# Altium PCB MainBoard.PcbDoc (part 3 of 5)
Units mm, origin at the board's own origin, x right, y up, seen from the top; angles counter-clockwise.
Board outline 82.15 x 81.5 mm, 4 copper layers (Top Layer, GND Top, GND Bot, Bottom Layer), stack 1.57 mm thick; 116 components, 97 nets, 468 pads, 3117 vias.
Unrouted connection lines stored in the file: 5.
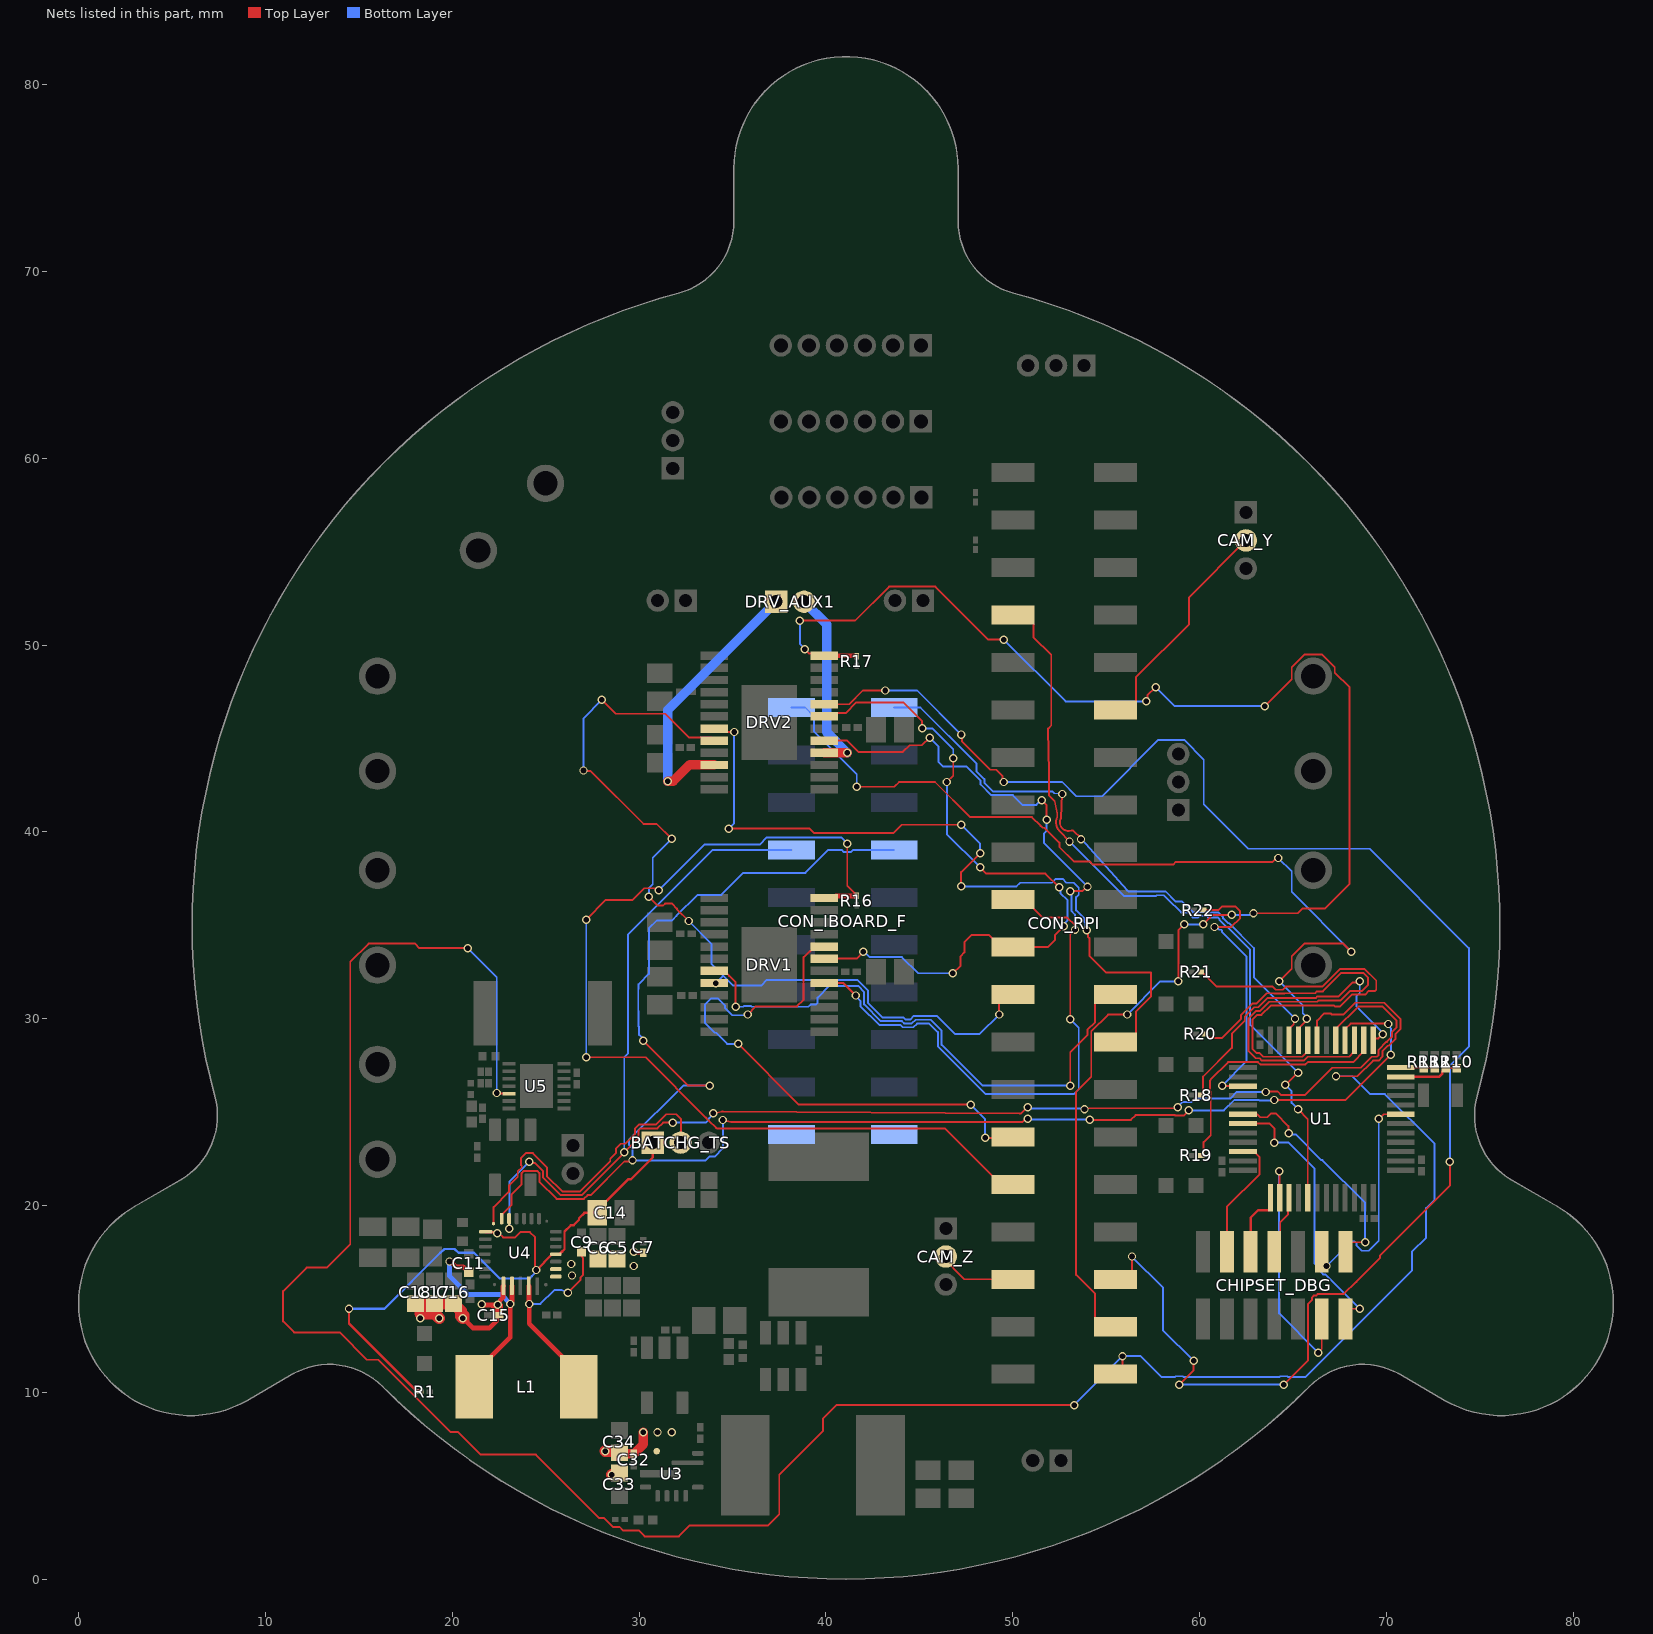
[diagram p4: the nets of this part, all layers, seen from the top]

## Via types
v1: diameter 0.45, hole 0.3, Top Layer to Bottom Layer, tented both sides, 3113 vias
v2: diameter 0.45, hole 0.3, Top Layer to Bottom Layer, 4 vias

## Nets (pads, with @x,y where several pads share a name; then routed paths per layer and width w, separated by ;. In a path a pad name is that pad's centre, name@x,y a point inside that pad or via, vN(x,y) a via of type N, cw(c..) or ccw(c..) an arc to the next point about the centre after c; other vN are vias at no path point) (continued)
BATCHG_REGN: BATCHG_TS.1 C14.2 R1.1 U4.5 U4.17 | length 33.4
  Top Layer w0.102: v1(22.412,18.513) 22.506,18.513 22.721,18.299 23.376,18.299 23.655,18.578 24.156,18.578 24.441,18.293 24.441,16.612 v1(24.504,16.549)
  Top Layer w0.127: v1(14.478,14.478) 14.478,13.679 18.056,10.101 18.22,10.101 R1.1@18.288,10.033 ; U4.17@21.797,18.599 21.834,18.563 22.362,18.563 v1(22.412,18.513) ; v1(24.504,16.549) 24.524,16.549 24.924,16.949 24.924,16.98 25.208,17.264 25.212,17.264 25.311,17.363 25.511,17.363 U4.5@25.547,17.399 25.747,17.399 25.882,17.534 25.886,17.534 26.012,17.66 26.012,18.61 26.352,18.949 26.499,18.949 26.788,19.237 26.788,19.321 27.076,19.609 C14.2@27.773,19.609 27.773,19.76 29.414,21.4 29.557,21.4 30.734,22.577 BATCHG_TS.1@30.734,23.368
  Bottom Layer w0.127: v1(14.478,14.478) 16.371,14.478 19.363,17.47 19.377,17.47 19.58,17.673 20.133,17.673 20.336,17.47 21.169,17.47 22.547,16.092 24.138,16.092 24.263,16.217 24.263,16.22 24.504,16.462 v1(24.504,16.549)
BATCHG_SCL: CON_IBOARD_F.7 U1.17 U4.14 | length 84
  Top Layer w0.102: U4.14@23.047,19.299 23.055,19.292 23.055,18.756 v1(23.062,18.749) ; v1(24.13,22.352) 24.197,22.285 24.411,22.285 24.872,21.824 24.872,21.492 25.806,20.558 26.936,20.558 29.21,22.832 v1(29.21,22.86) 29.982,23.632 29.982,24.031 30.08,24.13 30.988,24.13 31.295,24.437 v1(31.803,24.437) ; v1(33.973,24.937) 34.397,25.023 cw(c34.486,24.581) 34.49,25.032 50.362,24.922 50.446,24.922 50.787,25.263 v1(50.8,25.263) ; v1(53.848,25.146) 53.908,25.206 58.775,25.206 v1(58.835,25.266) ; v1(63.55,26.079) 63.575,26.105 64.19,26.105 64.386,25.908 65.646,25.908 67.113,27.375 68.623,27.375 69.213,27.965 69.501,27.965 69.59,28.055 69.59,28.342 70.007,28.759 70.037,28.759 70.301,29.023 70.301,29.277 70.555,29.531 70.555,29.905 69.807,30.653 68.5,30.653 67.298,29.451 U1.17@67.298,28.854
  Bottom Layer w0.102: v1(23.062,18.749) 23.062,21.284 v1(24.13,22.352) ; v1(29.21,22.86) 29.21,27.933 29.407,28.13 29.407,34.487 33.96,39.04 CON_IBOARD_F.7@38.159,39.04 ; v1(31.803,24.437) 33.58,24.437 33.724,24.581 33.724,24.652 33.973,24.901 v1(33.973,24.937) ; v1(50.8,25.263) 50.858,25.205 53.789,25.205 v1(53.848,25.146) ; v1(58.835,25.266) 59.115,25.546 59.582,25.546 59.773,25.737 61.664,25.737 62.007,26.079 v1(63.55,26.079)
BATCHG_SDA: CON_IBOARD_F.14 U1.16 U4.15 | length 91.9
  Top Layer w0.102: U4.15@22.647,19.299 22.647,19.499 23.171,20.023 23.171,20.586 23.714,21.129 23.714,21.74 23.831,21.858 24.551,21.858 24.668,21.74 24.668,21.278 25.592,20.355 27.049,20.355 27.253,20.558 27.416,20.558 29.224,22.366 29.6,22.366 v1(29.652,22.418) ; v1(30.225,28.829) 32.638,26.416 v1(33.782,26.416) ; v1(34.486,24.581) 34.914,24.475 50.543,24.475 50.706,24.638 v1(50.8,24.638) ; v1(54.128,24.587) 56.326,24.587 56.58,24.841 58.684,24.841 58.71,24.815 59.156,24.815 v1(59.436,25.095) ; v1(64.005,25.651) 64.008,25.654 67.827,25.654 v1(70.244,28.071) ; U1.16@67.798,28.854 67.798,29.451 68.09,29.743 70.079,29.743 v1(70.104,29.718)
  Bottom Layer w0.102: v1(30.225,28.829) 30.225,28.917 30.002,29.14 30.002,29.563 29.972,29.592 29.959,31.319 cw(c30.41,31.322) 29.959,31.333 29.971,31.801 29.972,31.841 30.001,31.87 30.531,32.4 30.531,34.833 30.963,35.265 31.521,35.265 31.525,35.261 31.767,35.261 32.006,35.499 32.006,35.503 33.136,36.633 34.411,36.633 35.586,37.808 38.902,37.808 40.135,39.04 40.84,39.04 40.961,38.919 41.335,38.919 41.456,39.04 CON_IBOARD_F.14@43.659,39.04 ; v1(33.782,26.416) 32.366,26.416 29.464,23.514 29.464,23.244 29.661,23.047 29.661,22.427 v1(29.652,22.418) 33.561,22.418 33.758,22.616 34.046,22.616 34.486,23.056 v1(34.486,24.581) ; v1(50.8,24.638) 50.826,24.612 54.102,24.612 v1(54.128,24.587) ; v1(59.436,25.095) 61.31,25.095 61.865,25.65 63.187,25.65 63.209,25.628 63.982,25.628 v1(64.005,25.651) ; v1(70.104,29.718) 70.104,29.624 70.258,29.469 70.258,28.858 70.244,28.843 v1(70.244,28.071)
BATCHG_SW1: C9.2 L1.2 U4.28 | length 11.5
  Top Layer w0.102: v1(26.197,15.335) 26.867,16.005 26.867,16.143 27.013,16.289 27.013,17.191 26.924,17.28 C9.2@26.924,17.534
  Top Layer w0.254: U4.28@24.097,15.699 24.114,15.683 24.114,14.748 v1(24.13,14.732) 24.13,13.666 26.784,11.012 L1.2@26.784,10.312
  Bottom Layer w0.102: v1(24.13,14.732) 24.723,14.732 25.467,15.476 25.858,15.476 v1(26.197,15.335)
BATCHG_SW2: C11.1 L1.1 U4.26 | length 12.2
  Top Layer w0.254: v1(19.856,17.007) 19.909,17.007 20.2,16.716 20.592,16.716 C11.1@20.885,16.423 ; L1.1@21.184,10.312 21.184,11.012 23.114,12.943 v1(23.114,14.732) 23.114,14.785 23.197,14.868 U4.26@23.197,15.699
  Bottom Layer w0.254: v1(19.856,17.007) 19.856,16.212 20.828,15.24 22.616,15.24 23.114,14.742 v1(23.114,14.732)
BATCHG_SYS: C15.1 C16.1 C17.1 C18.1 C32.2 C33.2 C34.2 U3.8 U4.25 | length 14.9
  Top Layer w0.254: C16.1@20.466,14.558 20.466,14.517 20.809,14.174 20.809,13.752 21.118,13.443 21.973,13.443 22.376,13.846 22.376,14.398 22.109,14.666 21.637,14.666 v1(21.59,14.713) ; v1@21.59,14.681 v1(22.43,14.681) v1@22.508,14.759 ; C15.1@22.529,14.122 22.533,14.122 22.587,14.177 v1@22.587,14.681 ; 22.587,14.95 22.72,15.084 22.72,15.672 U4.25@22.747,15.699
  Top Layer w0.508: C34.2@28.956,6.765 29.017,6.705 C32.2@29.718,6.705 30.226,7.213 v1(30.226,7.874)
  Top Layer w0.635: C18.1@18.17,14.631 18.288,14.512 18.288,14.224 19.05,14.224 v1(19.304,13.97) ; C18.1@18.17,14.631 C18.1@18.034,14.766 C17.1@19.05,14.766 C16.1@20.066,14.766 20.466,14.367 20.466,14.078 v1(20.574,13.97) ; v1(28.194,6.858) 28.863,6.858 C34.2@28.956,6.765 ; v1(28.539,5.588) 28.863,5.588 C33.2@28.956,5.681
  other v1: 30.988,7.874 31.75,7.874 18.288,13.97
BATCHG_TS: BATCHG_TS.2 U4.16 | length 17.4
  Top Layer w0.102: U4.16@22.216,19.03 22.216,19.919 23.031,20.733 23.031,21.057 23.51,21.537 23.51,21.824 23.723,22.037 23.723,22.121 23.679,22.165 23.679,22.539 23.943,22.803 24.317,22.803 25.075,22.045 25.075,21.576 25.89,20.761 26.852,20.761 28.461,22.371 28.461,22.511 28.759,22.809 28.759,23.047 29.023,23.311 29.261,23.311 29.778,23.828 29.778,24.115 29.996,24.333 30.904,24.333 31.458,24.888 31.989,24.888 32.254,24.623 32.254,23.388 BATCHG_TS.2@32.234,23.368
BATCHG_VBUS: C5.2 C6.2 C7.1 CON_IBOARD_F.1 CON_IBOARD_F.20 U4.2 U4.3 | length 0.5
  Top Layer w0.254: v1(29.718,17.526) 29.743,17.501 30.201,17.501 C7.1@30.226,17.476
  other v1: 26.416,16.256 29.718,16.764 26.379,16.87
BATMON_ALERT: CON_RPI.40 U1.19 U5.12 | length 137.8
  Top Layer w0.102: v1(20.828,33.782) 18.248,33.782 18.01,34.02 15.525,34.02 14.544,33.039 14.544,17.935 13.286,16.678 12.205,16.678 10.948,15.42 10.948,13.794 11.534,13.208 13.97,13.208 15.431,11.747 16.05,11.747 19.923,7.874 20.32,7.874 21.522,6.672 24.481,6.672 27.884,3.269 28.13,3.269 28.605,2.794 28.956,2.794 29.143,2.607 29.982,2.607 30.304,2.286 32.134,2.286 32.728,2.88 36.916,2.88 37.506,3.47 37.506,5.591 39.853,7.937 39.853,8.611 40.556,9.314 v1(53.289,9.314) ; v1(22.388,26.024) 22.405,26.007 23.019,26.007 U5.12@23.036,25.991 ; CON_RPI.40@55.512,10.973 55.88,11.34 v1(55.88,11.938) ; U1.19@66.298,28.854 66.298,29.904 66.676,30.282 67.022,30.282 67.086,30.218 67.696,30.218 68.335,30.856 69.891,30.856 70.758,29.989 70.758,29.447 70.504,29.193 70.504,28.939 70.121,28.556 70.091,28.556 69.793,28.258 69.793,27.971 69.585,27.762 69.298,27.762 68.459,26.924 v1(67.31,26.924)
  Bottom Layer w0.102: v1(20.828,33.782) 22.388,32.222 v1(22.388,26.024) ; v1(53.289,9.314) 53.289,9.331 55.88,11.921 v1(55.88,11.938) 56.856,11.938 57.967,10.827 58.703,10.827 58.741,10.865 59.115,10.865 59.153,10.827 64.291,10.827 64.329,10.865 64.703,10.865 64.741,10.827 65.691,10.827 71.374,16.51 71.374,17.526 72.129,18.281 72.129,19.862 72.587,20.32 72.587,23.301 69.922,25.965 69.143,25.965 68.184,26.924 v1(67.31,26.924)
CAM_PWM_Y: CAM_Y.2 CON_RPI.12 | length 12.3
  Top Layer w0.102: CON_RPI.12@55.512,46.533 56.152,46.533 56.612,46.992 56.612,48.296 59.443,51.128 59.443,52.561 CAM_Y.2@62.484,55.602
CAM_PWM_Z: CAM_Z.2 CON_RPI.35 | length 4.3
  Top Layer w0.102: CAM_Z.2@46.228,17.248 47.423,16.053 CON_RPI.35@50.013,16.053
CHIPSET_GNDDetect: CHIPSET_DBG.11 U1.38 | length 13.4
  Top Layer w0.102: v1(64.262,21.844) 64.28,21.826 64.28,20.44 U1.38@64.298,20.422 ; v1(66.356,12.13) 66.548,12.322 CHIPSET_DBG.11@66.548,13.407
  Bottom Layer w0.102: v1(64.262,21.844) 64.262,14.224 v1(66.356,12.13)
CHIPSET_INT: CON_RPI.7 U1.41 | length 41.2
  Top Layer w0.102: CON_RPI.7@50.013,51.613 50.653,51.613 51.112,51.154 51.112,50.431 52.066,49.477 52.066,45.697 51.903,45.534 51.903,45.45 51.952,43.232 51.952,41.947 52.255,41.644 52.391,40.984 52.391,40.794 ccw(c52.978,40.508) 52.503,40.059 v1(53.045,39.484) ; v1(64.586,26.46) 64.608,26.46 65.256,27.108 v1(65.278,27.108) ; v1(65.278,25.146) 65.798,24.626 U1.41@65.798,20.422
  Bottom Layer w0.102: v1(53.045,39.484) 55.953,36.576 57.689,36.576 57.725,36.612 58.099,36.612 58.277,36.433 59.019,35.692 59.37,35.692 59.634,35.428 59.936,35.428 60.011,35.503 60.385,35.503 60.46,35.428 60.987,35.428 61.068,35.347 61.068,35.289 61.451,34.906 61.509,34.906 62.713,33.702 62.713,29.674 v1(65.278,27.108) ; v1(64.586,26.46) 64.932,26.114 64.932,25.492 v1(65.278,25.146)
CHIPSET_LED_ACTIVITY: R19.1 U1.14 | length 13.9
  Top Layer w0.102: R19.1@60.096,22.682 60.142,22.682 60.223,22.763 60.223,23.395 60.604,23.776 60.604,26.101 60.56,26.145 60.56,26.687 60.604,26.731 60.604,26.752 61.532,27.68 63.131,27.68 63.252,27.559 65.674,27.559 65.795,27.68 68.221,27.68 68.798,28.258 U1.14@68.798,28.854
CHIPSET_LED_BAT: R22.1 U1.27 | length 15.1
  Top Layer w0.102: R22.1@60.198,35.814 61.018,35.814 61.215,36.011 61.909,36.011 62.173,35.747 62.173,35.373 61.712,34.912 v1(60.807,34.912) ; v1(61.214,26.416) 61.228,26.402 62.318,26.402 U1.27@62.332,26.388
  Bottom Layer w0.102: v1(60.807,34.912) 60.901,34.912 61.049,34.765 61.163,34.765 61.214,34.714 61.214,34.642 62.509,33.346 62.509,27.711 v1(61.214,26.416)
CHIPSET_LED_REG5: R20.1 U1.15 | length 26.5
  Top Layer w0.102: R20.1@60.3,29.185 60.346,29.185 60.57,28.96 61.206,28.96 62.223,29.978 62.223,30.195 62.844,30.816 63.062,30.816 63.608,31.362 63.979,31.362 63.991,31.35 64.533,31.35 64.545,31.362 66.19,31.362 66.291,31.464 66.604,31.464 67.595,32.455 68.767,32.455 69.031,32.191 69.031,31.817 68.705,31.491 68.072,31.491 67.562,30.982 66.384,30.982 66.313,30.911 63.732,30.911 63.23,30.41 63.013,30.41 62.63,30.027 62.63,28.269 63.015,27.883 63.215,27.883 63.337,27.762 65.59,27.762 65.793,27.965 68.006,27.965 68.298,28.258 U1.15@68.298,28.854
CHIPSET_LED_REG12: R21.1 U1.20 | length 23.8
  Top Layer w0.102: R21.1@60.071,32.512 60.117,32.512 60.914,31.715 63.913,31.715 64.075,31.553 64.449,31.553 64.611,31.715 66.568,31.715 67.511,32.658 68.851,32.658 69.462,32.047 69.462,31.551 69.403,31.491 69.37,31.491 69.07,31.491 68.867,31.288 68.156,31.288 67.518,30.649 67.265,30.649 67.201,30.714 66.403,30.714 66.398,30.708 63.816,30.708 63.314,30.207 63.097,30.207 62.833,29.942 62.833,29.682 62.839,29.682 62.839,28.384 63.049,28.175 63.211,28.175 63.421,27.965 65.506,27.965 65.798,28.258 U1.20@65.798,28.854
CHIPSET_LED_REGPI: R18.1 U1.13 | length 16.3
  Top Layer w0.102: R18.1@60.071,25.908 60.117,25.908 60.197,25.989 60.197,26.908 61.732,28.443 61.732,29.199 62.427,29.893 62.427,30.111 62.929,30.613 63.146,30.613 63.648,31.114 66.229,31.114 66.3,31.185 67.441,31.185 68.203,31.946 68.522,31.946 v1(68.58,32.004) ; U1.13@69.298,28.854 69.387,28.943 69.583,28.943 v1(69.808,29.168)
  Bottom Layer w0.102: v1(68.58,32.004) 68.58,31.375 68.4,31.195 68.4,30.66 69.808,29.252 v1(69.808,29.168)
CHIPSET_NRST: CHIPSET_DBG.12 U1.7 | length 12.9
  Top Layer w0.102: CHIPSET_DBG.12@66.548,17.907 66.548,17.018 v1(66.802,16.764) ; v1(69.596,24.638) 69.625,24.638 69.875,24.888 U1.7@70.764,24.888
  Bottom Layer w0.102: v1(66.802,16.764) 68.127,18.089 68.295,18.089 68.415,17.97 68.415,17.847 68.679,17.583 69.052,17.583 69.596,18.127 v1(69.596,24.638)
CHIPSET_REG5_SENSE: R10.1 R11.2 U1.11 | length 3.2
  Top Layer w0.127: U1.11@70.764,26.888 72.83,26.888 72.989,27.046 72.989,27.157 73.152,27.32 73.152,27.361 R10.1@73.66,27.361
CHIPSET_REGRPI_SENSE: R12.1 R13.2 U1.12 | length 1.9
  Top Layer w0.127: U1.12@70.764,27.388 72.617,27.388 R12.1@72.644,27.361
CHIPSET_SCL: CON_IBOARD_F.10 U1.21 | length 46.6
  Top Layer w0.102: v1(41.656,42.418) 43.67,42.418 43.924,42.672 45.844,42.672 47.726,40.79 51.033,40.79 51.498,40.326 ccw(c51.816,40.645) 51.5,40.324 ccw(c51.816,40.645) 51.726,40.203 52.501,39.428 52.501,39.193 53.276,38.417 54.132,38.417 54.299,38.25 58.587,38.25 58.729,38.393 63.922,38.393 64.131,38.602 v1(64.225,38.602) ; v1(64.262,32.004) 64.938,32.68 64.938,33.345 65.613,34.02 67.695,34.02 v1(68.129,33.585) ; U1.21@65.298,28.854 65.298,29.451 v1@65.675,29.828
  Bottom Layer w0.102: CON_IBOARD_F.10@38.159,46.66 38.899,46.66 39.358,46.201 39.358,45.389 41.656,43.091 v1(41.656,42.418) ; v1(64.225,38.602) 64.938,37.888 64.938,36.786 68.129,33.595 v1(68.129,33.585) ; v1(64.262,32.004) 65.532,30.734 65.532,30.294 65.741,30.085 v1(65.741,29.991)
CHIPSET_SDA: CON_IBOARD_F.11 U1.22 | length 32.2
  Top Layer w0.102: v1(52.653,42.031) 52.594,40.743 ccw(c52.978,40.508) 53.008,40.058 53.158,40.068 53.242,40.068 53.661,39.649 v1(53.661,39.607) ; U1.22@64.798,28.854 64.798,29.451 65.05,29.703 65.05,29.942 v1(65.116,30.009)
  Bottom Layer w0.102: CON_IBOARD_F.11@43.659,46.66 45.062,46.66 48.057,43.665 48.057,43.259 48.484,42.831 48.484,42.622 48.936,42.17 52.051,42.17 52.054,42.167 52.125,42.167 52.224,42.068 v1(52.653,42.031) ; v1(53.661,39.607) 53.68,39.626 53.682,39.626 56.131,36.875 56.191,36.815 58.183,36.815 58.714,36.284 59.065,36.284 59.657,35.692 59.913,35.692 59.927,35.706 60.469,35.706 60.483,35.692 61.01,35.692 61.271,35.431 61.271,35.373 61.535,35.109 61.593,35.109 62.916,33.786 62.916,32.21 v1(65.116,30.009)
CHIPSET_SWCLK: CHIPSET_DBG.6 U1.37 | length 3.3
  Top Layer w0.127: CHIPSET_DBG.6@62.738,17.907 62.738,19.347 63.139,19.748 63.722,19.748 63.798,19.825 U1.37@63.798,20.422
CHIPSET_SWDIO: CHIPSET_DBG.4 U1.34 | length 6.4
  Top Layer w0.102: CHIPSET_DBG.4@61.468,17.907 61.468,19.933 63.221,21.685 63.221,22.596 62.928,22.888 U1.34@62.332,22.888
CHIPSET_SWO: CHIPSET_DBG.8 U1.39 | length 2.8
  Top Layer w0.102: CHIPSET_DBG.8@64.008,17.907 64.327,18.226 64.327,19.115 64.745,19.533 64.745,20.368 U1.39@64.798,20.422
CHIPSET_VCP_RX: CHIPSET_DBG.13 U1.31 | length 15.5
  Top Layer w0.102: U1.31@62.332,24.388 62.334,24.386 63.752,24.386 64.008,24.13 v1(64.008,23.368) ; CHIPSET_DBG.13@67.818,13.407 67.818,14.159 68.137,14.478 v1(68.58,14.478)
  Bottom Layer w0.102: v1(64.008,23.368) 64.77,23.368 66.167,21.971 66.167,16.891 66.351,16.707 66.351,16.577 66.615,16.313 66.745,16.313 v1(68.58,14.478)
CHIPSET_VCP_TX: CHIPSET_DBG.14 U1.30 | length 12.4
  Top Layer w0.102: U1.30@62.332,24.888 63.091,24.888 63.252,24.727 63.626,24.727 63.831,24.932 64.087,24.932 64.766,24.253 64.766,23.88 v1(64.77,23.876) ; CHIPSET_DBG.14@67.818,17.907 67.818,18.223 68.007,18.034 v1(68.865,18.034)
  Bottom Layer w0.102: v1(64.77,23.876) 64.837,23.809 65.146,23.809 66.521,22.435 66.584,22.435 68.865,20.154 v1(68.865,18.034)
DRV2_OUT7: DRV2.4 DRV_AUX1.2 | length 10.3
  Top Layer w0.508: DRV2.4@39.912,44.233 39.916,44.237 v1(41.148,44.237)
  Bottom Layer w0.508: DRV_AUX1.2@38.838,52.324 40.059,51.103 40.059,45.326 v1(41.148,44.237)
DRV2_OUT8: DRV2.22 DRV_AUX1.1 | length 14.9
  Top Layer w0.508: v1(31.54,42.716) 31.834,42.716 32.718,43.6 34.019,43.6 DRV2.22@34.036,43.583
  Bottom Layer w0.508: v1(31.54,42.716) 31.54,46.526 DRV_AUX1.1@37.338,52.324
DRV_CE0: CON_RPI.24 DRV1.19 | length 30.8
  Top Layer w0.102: DRV1.19@34.036,32.564 34.549,32.564 34.821,32.291 34.837,32.291 35.174,31.955 v1(35.174,30.64) ; v1(53.086,26.416) 53.086,28.202 54.007,29.123 54.007,29.41 54.413,29.816 54.413,30.834 54.872,31.293 CON_RPI.24@55.512,31.293
  Bottom Layer w0.102: v1(35.174,30.64) 35.59,30.64 35.627,30.677 36.001,30.677 36.038,30.64 39.067,30.64 39.185,30.758 39.472,30.758 39.561,30.847 39.561,31.134 40.184,31.757 41.725,31.757 42.054,31.429 42.054,30.763 42.946,29.871 44.069,29.871 44.194,29.746 44.601,29.746 44.802,29.947 45.622,29.947 46.203,29.366 46.203,28.603 48.39,26.416 v1(53.086,26.416)
DRV_CE1: CON_RPI.26 DRV2.19 | length 42.5
  Top Layer w0.102: DRV2.19@34.036,45.533 34.21,45.359 35.083,45.359 v1(35.094,45.347) ; v1(34.798,40.177) 39.136,40.177 39.377,39.935 43.621,39.935 44.072,40.386 v1(47.244,40.386) ; v1(47.244,37.084) 47.244,37.846 v1(48.26,38.862) ; v1(53.962,34.741) 54.029,34.674 54.029,34.391 54.107,34.313 54.107,33.363 55.002,32.468 57.404,32.468 57.404,31.189 56.612,30.396 56.612,29.212 56.152,28.753 CON_RPI.26@55.512,28.753
  Bottom Layer w0.102: v1(34.798,40.177) 35.094,40.473 v1(35.094,45.347) ; v1(47.244,37.084) 50.207,37.084 50.404,37.281 52.107,37.281 52.307,37.481 52.681,37.481 52.881,37.281 53.273,37.281 53.537,37.017 53.537,36.643 53.402,36.509 53.402,35.801 53.848,35.356 53.848,35.169 53.899,35.118 53.899,34.804 v1(53.962,34.741) ; v1(47.244,40.386) 48.26,39.37 v1(48.26,38.862)
DRV_MISO: CON_RPI.21 DRV1.7 DRV2.7 | length 38.5
  Top Layer w0.102: DRV1.7@39.912,33.214 41.646,33.214 v1(42.009,33.577) ; DRV2.7@39.912,46.183 40.086,46.357 41.06,46.357 41.636,46.933 44.133,46.933 45.149,45.917 45.149,45.559 v1(45.169,45.539) ; v1(46.482,42.672) 46.821,43.011 v1(46.821,43.942) ; v1(46.803,32.432) 47.219,32.848 47.219,33.346 47.422,33.549 47.422,34.089 47.819,34.487 48.719,34.487 49.373,33.833 51.875,33.833 52.272,34.23 52.272,34.496 v1(52.736,34.96) ; v1(48.26,38.1) 48.588,37.772 51.752,37.772 v1(52.494,37.03)
  Bottom Layer w0.102: v1(42.009,33.577) 42.067,33.577 42.346,33.298 44.073,33.298 44.938,32.432 v1(46.803,32.432) ; v1(45.169,45.539) 45.706,45.539 46.821,44.424 v1(46.821,43.942) ; v1(46.482,42.672) 46.482,39.878 v1(48.26,38.1) ; v1(52.494,37.03) 52.561,36.964 52.561,36.718 52.946,36.333 52.946,35.264 52.736,35.054 v1(52.736,34.96)
DRV_MOSI: CON_RPI.19 DRV1.5 DRV2.5 | length 53.3
  Top Layer w0.102: DRV2.5@39.912,44.883 41.14,44.883 41.335,44.688 41.74,44.283 44.129,44.283 44.485,44.639 45.147,44.639 v1(45.558,45.05) ; CON_RPI.19@50.013,36.373 50.653,36.373 51.614,35.411 52.923,35.411 53.34,34.994 53.34,34.774 v1(53.338,34.772) ; v1(51.563,41.699) 51.563,41.672 51.816,41.419 v1(51.816,40.645) ; v1(53.086,29.972) 53.086,34.518 v1@53.339,34.771 ; v1(53.086,36.83) 53.714,36.83 53.954,37.069 v1(54.009,37.069)
  Top Layer w0.127: DRV1.5@39.912,31.914 40.931,31.914 v1(41.603,31.242)
  Bottom Layer w0.102: v1(41.603,31.242) 41.603,31.203 41.85,30.956 41.85,30.679 42.861,29.667 43.985,29.667 44.11,29.542 44.685,29.542 44.886,29.743 45.538,29.743 45.999,29.282 45.999,28.519 48.553,25.965 53.273,25.965 53.537,26.229 53.537,29.521 v1(53.086,29.972) ; v1(45.558,45.05) 46.031,44.576 46.031,43.755 46.295,43.491 47.537,43.491 48.281,42.747 48.281,42.538 48.852,41.967 50.009,41.967 50.525,41.451 51.276,41.451 51.524,41.699 v1(51.563,41.699) ; v1(51.816,40.645) 51.816,40.052 51.67,39.906 51.67,39.408 v1(54.009,37.069) ; v1(53.086,36.83) 53.149,36.767 53.149,35.767 53.338,35.578 v1(53.338,34.772)
DRV_NFAULT0: CON_RPI.31 DRV1.12 R16.2 | length 53.8
  Top Layer w0.102: v1(27.178,27.94) 30.349,27.94 33.582,24.707 33.612,24.668 ccw(c33.973,24.937) 33.704,24.576 33.743,24.547 34.13,24.16 34.159,24.13 46.375,24.13 49.373,21.133 CON_RPI.31@50.013,21.133 ; v1(27.178,35.306) 28.232,36.36 29.659,36.36 30.284,36.986 30.85,36.986 30.961,36.875 v1(31.056,36.875) ; v1(41.148,39.37) 41.148,37.13 41.656,36.622 R16.2@41.656,36.576
  Top Layer w0.254: DRV1.12@39.912,36.464 40.425,36.464 40.537,36.576 R16.2@41.656,36.576
  Bottom Layer w0.102: v1(27.178,27.94) v1(27.178,35.306) ; v1(31.056,36.875) 33.5,39.319 36.463,39.319 36.846,39.702 40.816,39.702 v1(41.148,39.37)
DRV_NFAULT1: CON_RPI.38 DRV2.12 R17.2 | length 87.2
  Top Layer w0.102: v1(38.608,51.308) 41.562,51.308 43.388,53.134 45.863,53.134 48.706,50.292 v1(49.53,50.292) ; v1(38.862,49.784) 39.09,49.556 39.789,49.556 DRV2.12@39.912,49.433 ; CON_RPI.38@55.512,13.513 54.872,13.513 54.413,13.972 54.413,15.276 53.397,16.293 53.397,26.09 54.21,26.903 54.21,29.326 55.11,30.226 v1(56.134,30.226) ; v1(57.147,46.987) 57.214,47.054 57.214,47.308 v1(57.658,47.752) ; v1(58.873,31.998) 58.873,34.743 v1(59.182,35.052) ; v1(60.198,35.052) 60.706,35.56 v1(61.722,35.56) ; v1(62.895,35.647) 65.267,35.647 65.515,35.895 66.709,35.895 68.034,37.219 68.034,47.739 67.243,48.529 67.243,48.814 66.568,49.489 65.613,49.489 64.938,48.814 64.938,48.174 v1(63.5,46.736)
  Top Layer w0.254: DRV2.12@39.912,49.433 41.652,49.433 41.656,49.429 R17.2@41.656,49.403
  Bottom Layer w0.102: v1(38.608,51.308) 38.608,50.064 38.862,49.81 v1(38.862,49.784) ; v1(49.53,50.292) 52.835,46.987 v1(57.147,46.987) ; v1(56.134,30.226) 57.906,31.998 v1(58.873,31.998) ; v1(57.658,47.752) 58.674,46.736 v1(63.5,46.736) ; v1(59.182,35.052) v1(60.198,35.052) ; v1(61.722,35.56) 62.713,35.56 62.8,35.647 v1(62.895,35.647)
DRV_NSLEEP0: CON_RPI.29 DRV1.8 | length 30.4
  Top Layer w0.102: v1(35.306,28.657) 38.563,25.4 v1(47.752,25.4) ; v1(35.814,30.226) 36.246,30.658 38.449,30.658 38.814,31.024 38.814,33.294 39.111,33.591 39.127,33.591 39.399,33.864 DRV1.8@39.912,33.864 ; v1(48.533,23.622) 49.962,23.622 CON_RPI.29@50.013,23.673
  Bottom Layer w0.102: v1(35.306,28.657) 34.718,28.657 34.125,29.251 34.055,29.251 33.528,29.778 33.528,30.759 33.847,31.078 34.237,31.078 34.612,30.703 34.612,30.564 34.987,30.189 35.777,30.189 v1(35.814,30.226) ; v1(47.752,25.4) 48.514,24.638 48.514,23.641 v1(48.533,23.622)
DRV_NSLEEP1: CON_RPI.36 DRV2.8 | length 89.1
  Top Layer w0.102: DRV2.8@39.912,46.833 41.248,46.833 41.985,47.57 v1(43.18,47.57) ; v1(47.244,45.212) 47.295,45.161 47.295,44.835 48.799,43.33 49.122,43.33 49.463,42.989 49.463,42.739 v1(49.53,42.672) ; CON_RPI.36@55.512,16.053 55.929,16.053 56.388,16.512 v1(56.388,17.272) ; v1(58.928,10.414) 59.69,11.176 v1(59.69,11.684) ; v1(64.516,10.414) 65.8,11.698 65.8,14.728 66.026,14.954 66.026,15.089 66.115,15.178 66.25,15.178 66.339,15.267 67.732,15.267 68.383,15.918 68.398,15.918 69.488,17.008 69.488,17.023 69.672,17.207 69.672,17.334 73.406,21.068 v1(73.406,22.352)
  Bottom Layer w0.102: v1(43.18,47.57) 44.886,47.57 v1(47.244,45.212) ; v1(49.53,42.672) 52.65,42.672 53.412,41.91 54.79,41.91 57.804,44.924 59.182,44.924 60.231,43.875 60.231,41.493 62.624,39.1 69.104,39.1 74.422,33.782 74.422,28.501 73.406,27.485 v1(73.406,22.352) ; v1(56.388,17.272) 58.039,15.621 58.039,13.335 v1(59.69,11.684) ; v1(58.928,10.414) v1(64.516,10.414)
DRV_SCLK: CON_RPI.23 DRV1.20 DRV2.20 | length 46.9
  Top Layer w0.102: v1(27.031,43.287) 27.058,43.259 27.408,43.259 30.243,40.424 30.95,40.424 v1(31.75,39.624) ; v1(28.014,47.064) 28.754,46.325 31.406,46.325 32.673,45.057 33.862,45.057 DRV2.20@34.036,44.883 ; v1(30.531,36.535) 31.014,36.052 31.283,36.052 31.394,36.163 31.767,36.163 32.031,35.899 32.031,35.86 v1(32.66,35.232) ; DRV1.20@34.036,31.914 34.061,31.889 v1(34.105,31.889) ; v1(49.276,30.226) 49.276,30.834 49.735,31.293 CON_RPI.23@50.013,31.293
  Bottom Layer w0.102: v1(27.031,43.287) 27.031,46.081 v1(28.014,47.064) ; v1(30.531,36.535) 30.531,36.987 30.734,37.19 30.734,38.608 v1(31.75,39.624) ; v1(32.66,35.232) 33.877,34.015 33.877,32.946 34.519,32.303 ; v1(34.105,31.889) 34.519,32.303 ; v1(49.276,30.226) 48.235,29.185 46.912,29.185 45.946,30.15 44.718,30.15 44.517,29.949 44.279,29.949 44.154,30.074 43.03,30.074 42.257,30.847 42.257,31.513 41.687,32.082 36.846,32.082 36.534,31.77 35.052,31.77 34.519,32.303